# Altium PCB Send_Medicine_Motor.PcbDoc (part 4 of 5)
Units mm, origin at the board's own origin, x right, y up, seen from the top; angles counter-clockwise.
Board outline 150.04 x 100.2 mm, 2 copper layers (Top Layer, Bottom Layer); 273 components, 158 nets, 892 pads, 508 vias.
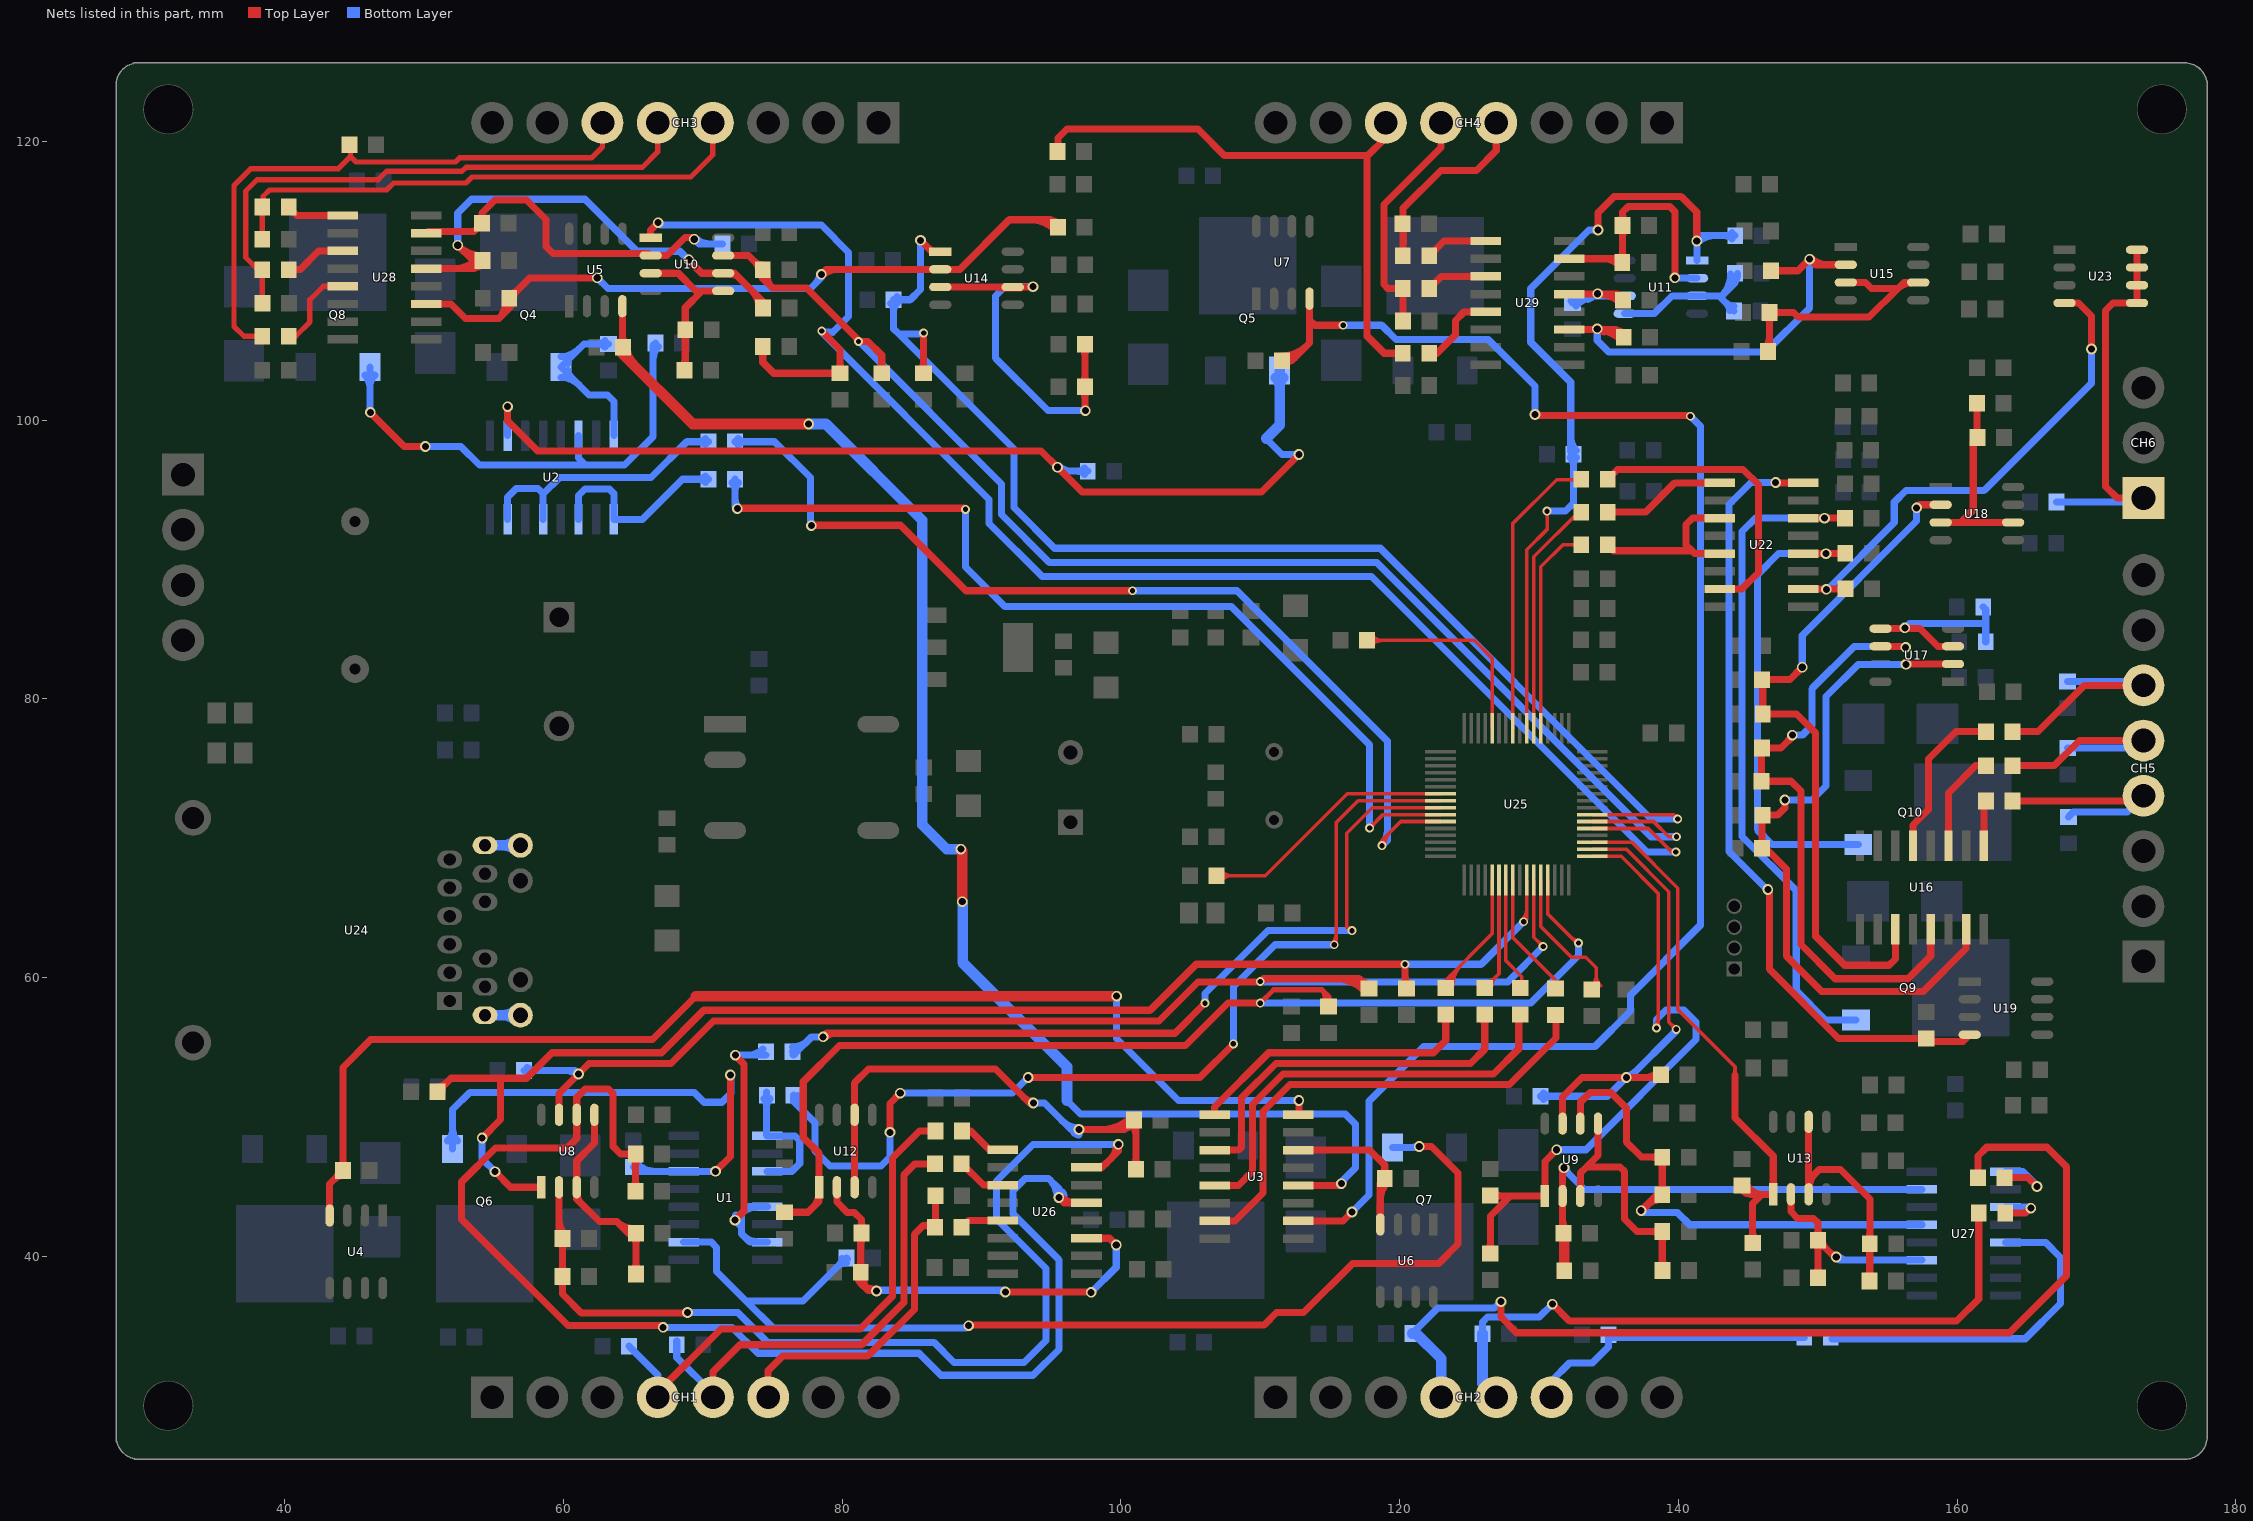
[diagram p4: the nets of this part, all layers, seen from the top]

## Via types
v1: diameter 0.762, hole 0.508, Top Layer to Bottom Layer, 415 vias
v2: diameter 1.27, hole 0.762, Top Layer to Bottom Layer, 47 vias
v3: diameter 0.635, hole 0.381, Top Layer to Bottom Layer, 43 vias
v4: diameter 3.4, hole 3.4, Top Layer to Bottom Layer, 2 vias
v5: diameter 0.6, hole 0.3, Top Layer to Bottom Layer, 1 vias

## Nets (pads, with @x,y where several pads share a name; then routed paths per layer and width w, separated by ;. In a path a pad name is that pad's centre, name@x,y a point inside that pad or via, vN(x,y) a via of type N, cw(c..) or ccw(c..) an arc to the next point about the centre after c; other vN are vias at no path point) (continued)
NetQ4_1: Q4.1 R8.1 U2.16 | length 16.3
  Bottom Layer w0.508: Q4.1@59.831,103.073 cw(c59.831,101.272) 61.105,102.545 ; Q4.1@59.831,104.565 ccw(c59.831,106.366) 61.105,105.093 ; Q4.1@60.327,103.569 ccw(c60.921,103.569) Q4.1@60.501,103.149 ; Q4.1@60.327,104.069 cw(c60.921,104.069) Q4.1@60.501,104.489 ; R8.1@62.993,105.248 ccw(c62.453,104.708) 62.453,105.471 ccw(c62.453,106.234) R8.1@62.993,105.694 ; R8.1@63.246,105.471 61.483,105.471 Q4.1@59.831,103.819 61.834,101.816 63.157,101.816 63.627,101.346 U2.16@63.627,98.885
NetQ5_1: Q5.1 R13.1 U2.10 | length 77.1
  Top Layer w0.508: v1(56.007,100.965) 56.007,99.949 58.166,97.79 94.285,97.79 v1(95.453,96.622) 97.231,94.844 110.084,94.844 v1(112.776,97.536)
  Bottom Layer w0.508: U2.10@56.007,98.885 v1(56.007,100.965) ; v1(95.453,96.622) 95.733,96.342 R13.1@97.627,96.342 ; v1@95.543,96.711 ccw(c96.434,97.603) 96.434,96.342 ; R13.1@97.404,96.119 ccw(c96.865,95.579) 96.865,96.342 ccw(c96.865,97.105) R13.1@97.404,96.566 ; 110.424,98.679 111.567,97.536 v1(112.776,97.536)
  Bottom Layer w0.762: 110.424,98.679 111.393,99.648 Q5.1@111.393,103.565 ; Q5.1@111.132,103.054 cw(c110.502,102.424) 111.393,102.424 cw(c112.284,102.424) Q5.1@111.654,103.054
NetQ6_1: Q6.1 R14.1 U1.14 | length 41.9
  Top Layer w0.508: v1(70.917,46.101) 71.984,47.168 v1(71.984,53.01)
  Bottom Layer w0.508: Q6.1@51.705,48.293 ccw(c50.859,49.139) 52.056,49.139 ccw(c53.253,49.139) Q6.1@52.407,48.293 ; Q6.1@52.056,47.692 52.056,50.532 53.289,51.765 69.393,51.765 70.104,51.054 71.374,51.054 72.009,51.689 72.009,52.984 v1(71.984,53.01) ; R14.1@65.024,46.421 65.344,46.101 U1.14@68.628,46.101 v1(70.917,46.101) ; R14.1@65.277,46.644 ccw(c66.589,47.956) 66.589,46.101
NetQ7_1: Q7.1 R15.1 U1.10 | length 82.5
  Top Layer w0.508: v1(89.078,35.027) 89.129,35.077 110.287,35.077 111.176,35.966 113.106,35.966 116.637,39.497 122.809,39.497 124.206,40.894 124.206,45.974 122.301,47.879 v1(121.412,47.879)
  Bottom Layer w0.508: U1.10@68.628,41.021 70.612,41.021 70.993,40.64 70.993,38.913 73.101,36.805 ; 79.627,39.241 cw(c80.33,38.537) R15.1@80.33,39.532 ; R15.1@79.858,39.472 ccw(c79.483,39.848) R15.1@80.014,39.848 ; R15.1@80.33,39.878 80.391,39.817 80.203,39.817 77.191,36.805 73.101,36.805 ; v1(89.078,35.027) 88.9,34.849 75.057,34.849 73.101,36.805 ; Q7.1@119.493,47.819 121.352,47.819 v1(121.412,47.879) ; 120.961,47.819 ccw(c120.961,48.33) v1@121.322,47.969
NetQ8_1: Q8.1 R16.1 U2.14 | length 38.4
  Top Layer w0.508: v1(46.152,100.559) 46.152,100.533 48.58,98.105 v1(50.099,98.105)
  Bottom Layer w0.508: Q8.1@45.764,103.218 cw(c44.918,102.372) 46.115,102.372 cw(c47.312,102.372) Q8.1@46.466,103.218 ; 46.115,100.954 ccw(c46.547,100.954) v1@46.242,100.648 ; Q8.1@46.115,103.819 46.115,100.595 v1(46.152,100.559) ; v1(50.099,98.105) 52.644,98.105 53.975,96.774 61.595,96.774 ; U2.14@61.087,98.885 61.087,97.282 61.595,96.774 ; 66.446,104.339 cw(c67.782,104.339) R16.1@66.837,105.284 ; R16.1@66.614,105.537 66.446,105.369 66.446,98.831 64.389,96.774 61.595,96.774
NetQ9_1: Q9.1 R88.1 U22.14 | length 49
  Top Layer w0.508: U22.14@148.974,92.964 v1(150.495,92.964) R88.1@151.958,92.964
  Bottom Layer w0.508: v1(150.495,92.964) 145.542,92.964 144.577,91.999 144.577,70.129 148.463,66.243 148.463,59.055 150.56,56.958 Q9.1@152.765,56.958
NetQ10_1: Q10.1 R112.1 U22.12 | length 34.6
  Top Layer w0.508: U22.12@148.974,90.424 v1(150.597,90.424) 151.958,90.424 R112.1@151.983,90.449
  Bottom Layer w0.508: v1(150.597,90.424) 147.193,90.424 145.669,88.9 145.669,70.612 146.724,69.557 Q10.1@152.917,69.557
NetR1_1: R1.1 U3.16 U4.4 | length 90.1
  Top Layer w0.508: U4.4@43.231,42.926 43.231,45.197 R1.1@44.186,46.152 44.186,53.558 46.177,55.55 66.396,55.55 69.52,58.674 ; 43.595,45.561 cw(c44.186,44.97) R1.1@44.186,45.806 ; R1.1@43.668,45.634 ccw(c43.179,46.122) R1.1@43.87,46.122 ; R1.1@43.962,46.405 ccw(c43.423,46.945) 44.186,46.945 ccw(c44.949,46.945) R1.1@44.409,46.405 ; U3.16@112.728,50.165 112.776,50.213 v1(112.776,51.181)
  Top Layer w0.762: 69.52,58.674 v1(99.695,58.674)
  Bottom Layer w0.508: v1(99.695,58.674) 99.695,55.626 104.14,51.181 v1(112.776,51.181)
NetR2_1: R2.1 U3.12 U5.4 | length 109.2
  Top Layer w0.508: R2.1@64.049,105.486 ccw(c63.595,105.939) 64.237,105.939 ; R2.1@64.237,105.268 U5.4@64.237,108.179 ; 64.237,106.111 ccw(c65.121,106.111) R2.1@64.496,105.486 ; U3.12@112.728,45.085 115.517,45.085 v1@115.734,45.302 ; v1@115.824,45.085 v1(115.824,45.212)
  Top Layer w0.762: R2.1@64.237,105.232 R2.1@64.237,105.268 ; R2.1@64.272,105.232 64.272,104.739 69.291,99.72 v1(77.597,99.72) ; R2.1@64.461,105.202 ccw(c66.035,105.202) 64.922,104.09 ; v1(88.519,69.215) 88.621,69.113 v1(88.621,65.456)
  Bottom Layer w0.508: 96.139,51.181 97.104,50.216 116.103,50.216 116.84,49.479 116.84,46.355 115.57,45.085 115.824,45.085 v1(115.824,45.212) ; v1@115.951,45.212 cw(c116.564,45.212) 116.131,45.646
  Bottom Layer w0.762: v1(77.597,99.72) 78.842,99.72 85.75,92.812 85.75,70.968 87.503,69.215 v1(88.519,69.215) ; v1(88.621,65.456) 88.646,65.43 88.646,61.087 96.139,53.594 96.139,51.181
NetR3_2: R3.2 U3.1 | length 22.2
  Top Layer w0.508: U3.1@106.728,50.165 106.728,50.721 110.617,54.61 122.428,54.61 123.317,55.499 R3.2@123.317,57.343 ; R3.2@123.094,57.12 cw(c122.554,56.58) 123.317,56.58 cw(c124.08,56.58) R3.2@123.54,57.12
NetR4_2: R4.2 U3.5 | length 31.2
  Top Layer w0.508: U3.5@106.728,45.085 108.433,45.085 109.449,46.101 109.449,50.902 111.633,53.086 126.746,53.086 128.555,54.895 R4.2@128.555,57.12 ; R4.2@128.778,57.12 R4.2@128.778,57.343
NetR9_2: R9.2 U2.5 U2.7 | length 21
  Bottom Layer w0.508: U2.7@56.007,92.885 56.007,94.488 56.617,95.098 58.191,95.098 58.547,94.742 58.547,94.691 ; U2.5@58.547,92.885 58.547,94.691 ; R9.2@70.201,98.227 ccw(c69.661,97.688) 69.661,98.45 ccw(c69.661,99.213) R9.2@70.201,98.674 ; R9.2@70.424,98.45 68.859,98.45 66.294,95.885 59.741,95.885 58.547,94.691
NetR10_2: R10.2 U1.1 U1.3 | length 11.1
  Bottom Layer w0.508: R10.2@74.392,51.309 cw(c73.975,50.892) 74.564,50.892 ; 74.564,50.646 cw(c75.501,50.646) R10.2@74.838,51.309 ; R10.2@74.564,51.791 74.564,48.705 U1.1@74.628,48.641 76.632,48.641 76.962,48.311 76.962,46.66 76.403,46.101 U1.3@74.628,46.101
NetR11_2: R11.2 U1.5 U1.7 | length 25.7
  Top Layer w0.508: v1(72.314,42.596) 72.949,43.231 72.949,53.797 72.314,54.432 v1(72.339,54.432)
  Bottom Layer w0.508: v1@72.3,42.47 cw(c72.237,41.913) 72.796,41.913 ; v1(72.314,42.596) 72.796,42.113 ; v1(72.339,54.432) R11.2@74.539,54.432 ; 72.357,42.974 cw(c72.301,42.482) 72.796,42.482 ; 72.812,43.094 cw(c73.828,42.079) U1.5@73.828,43.515 ; 72.986,41.416 ccw(c73.828,42.258) U1.7@73.828,41.067 ; 73.235,54.432 ccw(c73.235,55.96) R11.2@74.315,54.88 ; U1.7@74.628,41.021 73.381,41.021 72.796,41.605 72.796,42.113 ; U1.5@74.628,43.561 73.279,43.561 72.796,43.078 72.796,42.113
NetR12_2: R12.2 U2.1 U2.3 | length 15.6
  Bottom Layer w0.508: U2.3@61.087,92.885 61.087,94.59 61.544,95.047 63.297,95.047 63.627,94.717 U2.1@63.627,92.885 65.682,92.885 68.555,95.758 R12.2@70.399,95.758 ; R12.2@70.201,95.535 ccw(c69.661,94.995) 69.661,95.758 ccw(c69.661,96.521) R12.2@70.201,95.981
NetR17_2: R17.2 U16.1 | length 3.3
  Top Layer w0.508: U16.1@161.925,69.472 161.925,72.527 R17.2@162.067,72.669
NetR21_1: R21.1 U3.14 U6.4 | length 13.7
  Top Layer w0.508: U3.14@112.728,47.625 117.856,47.625 118.938,46.543 R21.1@118.938,45.593 118.618,45.273 U6.4@118.618,42.291 ; 118.618,44.028 cw(c120.473,44.028) R21.1@119.161,45.34 ; R21.1@118.715,45.846 ccw(c118.175,46.386) 118.938,46.386 ccw(c119.701,46.386) R21.1@119.161,45.846
NetR22_2: R22.2 U16.3 | length 7.3
  Top Layer w0.508: U16.3@159.385,69.472 159.385,73.254 161.341,75.209 R22.2@162.093,75.209
NetR23_2: R23.2 R24.1 U17.3 U17.5 | length 14.2
  Top Layer w0.508: U17.5@154.515,85.039 157.353,85.039 158.623,83.769 U17.3@159.715,83.769
  Bottom Layer w0.508: v1(156.261,85.09) 156.591,85.42 162.062,85.42 ; R24.1@161.884,86.589 162.062,86.411 162.062,85.42 ; R23.2@162.062,84.099 162.062,85.42
NetR26_1: R26.1 U3.10 U7.4 | length 120.6
  Top Layer w0.508: R26.1@111.567,104.105 ccw(c111.567,105.406) 112.487,104.486 ; R26.1@111.567,104.267 112.268,104.267 ; R26.1@111.567,104.613 ccw(c111.567,107.141) 113.354,105.353 ; R26.1@111.804,104.058 cw(c112.268,103.648) 112.268,104.267 ; R26.1@111.804,104.476 ccw(c112.268,104.886) 112.268,104.267 ; U3.10@112.728,42.545 115.951,42.545 v1(116.586,43.18) ; U7.4@113.538,108.712 113.538,107.188 ; v3(115.951,106.807) 113.919,106.807 113.538,107.188 ; v1(129.718,100.406) 129.794,100.33 140.818,100.33 v3(140.868,100.279) ; v1@129.808,100.496 ccw(c130.208,100.897) 130.208,100.33 ; 112.268,104.267 113.538,105.537 113.538,107.188
  Bottom Layer w0.508: v3(115.951,106.807) 118.72,106.807 119.736,105.791 126.365,105.791 129.718,102.438 v1(129.718,100.406) ; v1(116.586,43.18) 117.805,44.399 117.805,51.13 121.717,55.042 134.01,55.042 136.563,57.594 136.563,58.737 141.58,63.754 141.58,99.568 v3(140.868,100.279)
NetR27_2: R27.2 U3.3 | length 28.1
  Top Layer w0.508: U3.3@106.728,47.625 108.458,47.625 108.661,47.828 108.661,51.384 111.125,53.848 125.095,53.848 126.111,54.864 R27.2@126.111,57.343 ; R27.2@125.888,57.12 cw(c125.348,56.58) 126.111,56.58 cw(c126.874,56.58) R27.2@126.334,57.12
NetR28_2: R28.2 U3.7 | length 35
  Top Layer w0.508: U3.7@106.728,42.545 108.204,42.545 110.211,44.552 110.211,50.394 112.141,52.324 127.889,52.324 131.222,55.657 R28.2@131.222,57.12 ; R28.2@131.445,57.12 R28.2@131.445,57.343
NetR29_2: R29.2 U26.1 | length 3.5
  Top Layer w0.508: R29.2@88.605,48.997 89.23,48.997 90.576,47.65 U26.1@91.539,47.65
NetR30_2: R30.2 U27.1 | length 5.3
  Top Layer w0.508: R30.2@163.408,45.644 165.1,45.644 v1(165.735,45.009)
  Bottom Layer w0.508: U27.1@163.477,46.076 164.744,46.076 165.735,45.085 v1(165.735,45.009)
NetR31_2: R31.2 U28.1 | length 4
  Top Layer w0.508: R31.2@40.371,115.189 40.879,114.681 U28.1@44.168,114.681
NetR32_2: R32.2 U29.1 | length 4.5
  Top Layer w0.508: R32.2@122.133,111.785 123.2,112.852 U29.1@126.184,112.852
NetR37_2: R37.2 R45.1 U8.3 U8.5 | length 20.1
  Top Layer w0.508: U8.3@61.006,44.458 ccw(c61.934,44.458) 61.278,43.802 ; U8.5@62.23,50.158 62.23,48.133 60.96,46.863 U8.3@60.96,44.958 60.96,44.12 62.586,42.494 63.83,42.494 ; 64.599,41.725 ccw(c65.163,42.29) R45.1@65.234,41.495 ; R37.2@64.994,38.988 ccw(c64.454,39.528) 65.217,39.528 ccw(c65.98,39.528) R37.2@65.44,38.988 ; R45.1@64.994,41.403 cw(c64.454,40.863) 65.217,40.863 cw(c65.98,40.863) R45.1@65.44,41.403 ; R45.1@65.189,42.001 cw(c65.038,43.701) 63.83,42.494 ; R37.2@65.217,38.735 R45.1@65.217,41.656 64.668,41.656 63.83,42.494
NetR38_2: R38.2 U26.3 | length 3.6
  Top Layer w0.508: R38.2@88.58,46.634 88.621,46.634 90.145,45.11 U26.3@91.539,45.11
NetR39_2: R39.2 R46.1 U9.3 U9.5 | length 21.5
  Top Layer w0.508: U9.3@132.969,44.323 132.969,45.974 133.413,46.419 ; U9.5@134.239,49.523 134.239,47.244 133.413,46.419 ; R46.1@138.628,41.53 cw(c138.089,40.99) 138.852,40.99 cw(c139.614,40.99) R46.1@139.075,41.53 ; R46.1@138.628,41.56 ccw(c138.089,41.02) 138.089,41.783 ccw(c138.089,42.546) R46.1@138.628,42.006 ; R39.2@138.654,39.242 ccw(c138.175,39.721) 138.852,39.721 ; 138.852,39.843 ccw(c139.701,39.843) R39.2@139.1,39.242 ; R39.2@138.877,38.989 138.852,39.014 R46.1@138.852,41.783 137.033,41.783 136.144,42.672 136.144,46.101 135.826,46.419 133.413,46.419
NetR40_2: R40.2 U27.3 | length 4.3
  Top Layer w0.508: R40.2@163.459,43.104 164.897,43.104 165.278,43.485 v1(165.303,43.459)
  Bottom Layer w0.508: U27.3@163.477,43.536 165.227,43.536 v1(165.303,43.459) ; 164.813,43.536 cw(c164.813,42.969) v1@165.213,43.37
NetR41_2: R41.2 R49.1 U10.3 U10.5 | length 15.5
  Top Layer w0.508: U10.3@66.269,110.541 68.25,110.541 69.52,109.271 69.952,109.271 ; R49.1@68.473,103.835 ccw(c67.811,104.497) 68.748,104.497 ; R41.2@68.524,106.223 cw(c67.985,105.684) 68.748,105.684 cw(c69.51,105.684) R41.2@68.971,106.223 ; R41.2@68.524,106.73 ccw(c67.985,107.27) 68.748,107.27 ccw(c69.51,107.27) R41.2@68.971,106.73 ; R49.1@68.697,103.581 68.748,103.632 R41.2@68.748,106.477 68.748,108.067 69.952,109.271 ; 68.748,104.251 ccw(c69.337,104.251) R49.1@68.92,103.835 ; U10.5@71.469,109.271 69.952,109.271
NetR42_2: R42.2 U28.3 | length 4.4
  Top Layer w0.508: R42.2@40.295,110.795 41.097,110.795 42.443,112.141 U28.3@44.168,112.141
NetR43_2: R43.2 R50.1 U11.3 U11.5 | length 14.2
  Bottom Layer w0.508: U11.5@136.151,107.645 138.278,107.645 139.548,108.915 U11.3@141.351,108.915 142.916,108.915 ; 143.417,108.414 ccw(c144.008,109.004) R50.1@144.008,108.169 ; R50.1@143.49,108.341 cw(c143.001,107.853) R50.1@143.692,107.853 ; R43.2@143.743,110.5 cw(c141.609,110.425) 143.119,108.915 ; 143.945,109.741 ccw(c143.205,110.481) R43.2@144.25,110.518 ; R50.1@144.008,107.823 142.916,108.915 ; 144.059,109.855 143.119,108.915 ; 142.916,108.915 143.119,108.915
NetR44_2: R44.2 U29.3 | length 4.4
  Top Layer w0.508: R44.2@122.133,109.449 122.997,110.312 U29.3@126.184,110.312
NetR53_2: R53.2 U26.5 | length 3.2
  Top Layer w0.508: R53.2@88.58,42.088 89.063,42.57 U26.5@91.539,42.57
NetR54_2: R54.2 U27.5 | length 25.9
  Bottom Layer w0.508: R54.2@151.039,34.087 164.897,34.087 167.437,36.627 167.437,39.929 166.37,40.996 U27.5@163.477,40.996 ; R54.2@151.16,34.382 ccw(c151.873,35.094) 151.873,34.087
NetR55_2: R55.2 U28.5 | length 6.3
  Top Layer w0.381: R55.2@40.295,106.02 40.792,106.02 41.808,107.036 41.808,108.636 42.774,109.601 U28.5@44.168,109.601
NetR56_2: R56.2 U29.5 | length 5.9
  Top Layer w0.508: R56.2@122.133,104.8 122.682,104.8 124.003,106.121 124.003,107.137 124.638,107.772 U29.5@126.184,107.772
NetR63_2: R63.2 R69.1 U12.3 U12.6 | length 43.2
  Top Layer w0.508: U12.3@80.899,44.958 U12.6@80.899,50.158 80.899,52.451 81.89,53.442 91.008,53.442 93.447,51.003 v1(93.726,51.003) ; 93.032,51.418 ccw(c93.726,52.111) v1@93.726,51.13 ; v1(97.003,49.098) 100.269,49.098 R69.1@100.955,49.784 101.082,49.657 R63.2@101.082,46.253 ; 98.609,49.098 ccw(c98.609,52.1) R69.1@100.731,49.977 ; 99.835,49.098 ccw(c99.835,50.874) R69.1@101.091,49.618 ; 100.364,49.193 cw(c100.955,48.603) R69.1@100.955,49.438 ; R69.1@100.437,49.266 ccw(c99.948,49.754) R69.1@100.639,49.754 ; R69.1@100.731,49.531 cw(c99.885,48.685) 101.082,48.685 ; R63.2@100.858,46.507 ccw(c100.319,47.046) 101.082,47.046 ccw(c101.845,47.046) R63.2@101.305,46.507
  Bottom Layer w0.508: v1(93.726,51.003) 94.513,51.003 96.418,49.098 v1(97.003,49.098) ; 95.789,49.728 ccw(c97.003,50.942) v1@97.003,49.225 ; 96.656,48.861 ccw(c97.003,49.208) 97.003,48.717
NetR64_2: R64.2 R70.1 U13.3 U13.6 | length 21
  Top Layer w0.508: U13.3@149.352,44.45 149.352,45.466 ; U13.6@149.352,49.65 149.352,45.466 ; U13.3@149.398,44.95 cw(c150.755,44.95) 149.795,45.909 ; R70.1@153.487,38.48 ccw(c152.886,39.081) 153.736,39.081 ; R64.2@153.513,40.641 cw(c152.973,40.101) 153.736,40.101 cw(c154.499,40.101) R64.2@153.959,40.641 ; R64.2@153.513,41.147 ccw(c152.948,41.712) 153.746,41.712 ; R70.1@153.711,38.227 153.736,38.252 R64.2@153.736,40.894 ; 153.736,38.959 ccw(c154.412,38.959) R70.1@153.934,38.48 ; R64.2@153.736,41.275 153.746,41.285 153.746,44.12 151.638,46.228 150.114,46.228 149.352,45.466 ; 153.746,41.662 ccw(c154.474,41.662) R64.2@153.959,41.147
NetR67_2: R67.2 R71.1 U14.3 U14.6 | length 32.5
  Top Layer w0.508: U14.3@87.046,109.55 U14.6@92.246,109.55 U14.6@92.913,109.55 ; 91.306,109.474 92.837,109.474 U14.6@92.913,109.55 ; 91.451,109.474 ccw(c91.451,109.845) U14.6@91.713,109.583 ; v1(93.701,109.576) 93.675,109.55 U14.6@92.913,109.55 ; R67.2@97.196,102.134 cw(c96.656,101.595) 97.419,101.595 cw(c98.182,101.595) R67.2@97.643,102.134 ; R67.2@97.196,102.641 ccw(c96.656,103.18) 97.419,103.18 ccw(c98.182,103.18) R67.2@97.643,102.641 ; R71.1@97.196,105.182 cw(c96.656,104.643) 97.419,104.643 cw(c98.182,104.643) R71.1@97.643,105.182 ; 97.419,101.09 ccw(c97.864,101.09) v1@97.55,100.775 ; R67.2@97.419,102.387 97.419,100.726 v1(97.46,100.686) ; R67.2@97.419,102.819 R71.1@97.419,105.486 ; R67.2@97.46,102.387 R67.2@97.46,102.54
  Bottom Layer w0.508: v1(93.701,109.576) 93.675,109.601 91.694,109.601 91.008,108.915 91.008,104.445 94.767,100.686 v1(97.46,100.686)
NetR68_2: R68.2 R72.1 U15.3 U15.6 | length 22.9
  Top Layer w0.508: R68.2@146.218,105.181 ccw(c145.433,105.966) 146.543,105.966 ; R72.1@146.319,107.468 cw(c145.78,106.929) 146.543,106.929 cw(c147.306,106.929) R72.1@146.766,107.468 ; R68.2@146.441,104.927 146.543,105.029 R72.1@146.543,107.721 148.26,107.721 148.59,107.391 153.695,107.391 155.753,109.449 ; R72.1@146.766,107.498 cw(c147.306,106.959) 147.306,107.721 cw(c147.306,108.484) R72.1@146.766,107.945 ; U15.3@152.019,109.88 153.441,109.88 153.873,109.449 155.753,109.449 ; U15.6@156.718,109.834 ccw(c156.685,108.516) 155.753,109.449 ; U15.6@157.219,109.88 156.185,109.88 155.753,109.449
NetR77_2: R77.2 U16.5 | length 11.6
  Top Layer w0.508: U16.5@156.845,69.472 156.845,70.942 157.963,72.06 157.963,75.692 159.918,77.648 R77.2@162.093,77.648
NetR81_2: R81.2 R82.1 U18.3 U18.6 | length 14.3
  Top Layer w0.508: U18.3@158.826,92.659 160.249,92.659 ; R82.1@161.432,101.219 161.432,98.73 161.163,98.461 161.163,93.574 160.249,92.659 ; U18.6@164.026,92.659 160.249,92.659
NetR86_1: R86.1 U19.4 U22.16 | length 57.3
  Top Layer w0.508: v1(146.431,66.319) 146.533,66.218 146.533,60.604 151.496,55.641 R86.1@157.785,55.641 158.003,55.423 160.426,55.423 U19.4@160.909,55.905 ; v1(146.99,95.529) 147.015,95.504 U22.16@148.974,95.504
  Bottom Layer w0.508: v1(146.431,66.319) 146.355,66.319 143.637,69.037 143.637,93.955 145.212,95.529 v1(146.99,95.529)
NetR87_2: R87.2 U22.1 | length 8.9
  Top Layer w0.508: R87.2@134.935,93.396 137.643,93.396 139.751,95.504 U22.1@142.974,95.504
NetR89_2: R89.2 U22.3 U22.5 | length 12.9
  Top Layer w0.508: R89.2@134.935,91.059 135.367,90.627 140.97,90.627 ; U22.5@142.974,90.424 141.173,90.424 140.97,90.627 ; U22.3@142.974,92.964 141.021,92.964 140.564,92.507 140.564,91.034 140.97,90.627
NetR91_2: R91.2 U25.60 | length 16.1
  Top Layer w0.254: R91.2@117.729,84.201 125.349,84.201 126.636,82.914 U25.60@126.636,77.9 ; R91.2@118.043,83.887 cw(c118.802,83.128) 118.802,84.201 cw(c118.802,85.274) R91.2@118.043,84.515
NetR93_2: R93.2 U25.7 | length 20.1
  Top Layer w0.254: R93.2@106.934,67.31 110.363,67.31 116.253,73.2 U25.7@122.936,73.2 ; R93.2@107.248,66.996 cw(c108.007,66.237) 108.007,67.31 cw(c108.007,68.383) R93.2@107.248,67.624
NetR94_2: R94.2 U25.28 | length 11.8
  Top Layer w0.254: U25.28@130.136,67 130.136,63.666 132.334,61.468 133.35,61.468 134.112,60.706 R94.2@134.112,59.116 ; R94.2@133.799,59.429 ccw(c133.043,60.185) 134.112,60.185 ccw(c135.181,60.185) 134.425,59.429
NetR113_1: R113.1 U22.10 U23.4 | length 36.2
  Top Layer w0.508: U22.10@148.974,87.884 151.983,87.884 R113.1@152.009,87.909 ; U23.4@167.716,108.407 168.707,108.407 169.647,107.467 v1(169.647,105.105)
  Bottom Layer w0.508: v1(150.622,87.859) 150.698,87.859 155.499,92.659 155.499,94.107 156.337,94.945 161.95,94.945 169.647,102.641 v1(169.647,105.105)
NetR114_2: R114.2 U22.7 | length 21.1
  Top Layer w0.508: R114.2@134.935,95.758 135.646,96.469 144.653,96.469 145.745,95.377 145.745,89.078 144.551,87.884 U22.7@142.974,87.884
NetU24_7: U24.7 U24.13 | length 4.5
  Bottom Layer w0.762: U24.7@54.381,57.302 U24.13@56.921,57.302 ; U24.13@56.562,56.943 ccw(c55.695,56.076) 55.695,57.302 ccw(c55.695,58.529) U24.13@56.562,57.662
NetU24_12: U24.12 U24.16 | length 4.5
  Bottom Layer w0.762: U24.12@54.381,69.494 U24.16@56.921,69.494 ; U24.16@56.562,69.135 ccw(c55.695,68.268) 55.695,69.494 ccw(c55.695,70.721) U24.16@56.562,69.854
PL1: R3.1 U25.21 | length 14
  Top Layer w0.254: R3.1@123.205,59.672 ccw(c123.167,59.817) 123.317,59.817 ; R3.1@123.282,59.243 cw(c124.583,59.243) 123.663,60.163 ; R3.1@123.317,59.243 123.317,59.817 ; R3.1@123.429,59.672 cw(c123.467,59.817) 123.317,59.817 ; R3.1@123.536,59.243 cw(c125.45,59.243) 124.097,60.597 ; R3.1@123.79,59.243 cw(c126.318,59.243) 124.53,61.03 ; U25.21@126.636,67 126.636,63.136 123.317,59.817
PL2: R27.1 U25.22 | length 9.9
  Top Layer w0.254: R27.1@126.111,59.243 127.136,60.268 U25.22@127.136,67 ; R27.1@126.141,59.686 ccw(c126.141,60.683) 126.846,59.978 ; R27.1@126.584,59.243 cw(c127.726,59.243) 126.918,60.05
PL3: R4.1 U25.23 | length 8.2
  Top Layer w0.254: U25.23@127.636,67 127.636,61.213 128.778,60.071 R4.1@128.778,59.243
PL4: R28.1 U25.24 | length 9
  Top Layer w0.254: U25.24@128.136,67 128.136,62.872 131.226,59.782 R28.1@131.226,59.243
PL5: R87.1 U25.54 | length 17
  Top Layer w0.254: U25.54@129.636,77.9 129.636,90.19 132.842,93.396 R87.1@133.035,93.396
PM1: R10.1 U25.8 | length 72.6
  Top Layer w0.254: v3@115.181,62.492 ccw(c114.549,63.124) 115.443,63.124 ; v3(115.316,62.357) 115.443,62.484 115.443,71.12 117.023,72.7 U25.8@122.936,72.7
  Top Layer w0.508: v1(83.439,48.895) 83.439,50.978 v1(84.176,51.714) ; v1(93.345,52.832) 105.664,52.832 v3(108.077,55.245)
  Bottom Layer w0.508: R10.1@76.515,51.562 76.515,51.12 78.054,49.581 78.054,47.549 79.121,46.482 82.804,46.482 83.439,47.117 v1(83.439,48.895) ; R10.1@76.831,51.532 ccw(c78.589,51.532) 77.346,50.289 ; v1(84.176,51.714) 92.227,51.714 v1(93.345,52.832) ; v3(108.077,55.245) 108.077,59.36 111.074,62.357 v3(115.316,62.357)
PM2: R11.1 U25.9 | length 61.8
  Top Layer w0.254: v3@116.524,63.553 cw(c116.424,63.846) 116.205,63.627 ; v3(116.586,63.373) 116.459,63.373 116.205,63.627 ; U25.9@122.936,72.2 118.047,72.2 116.205,70.358 116.205,63.627
  Top Layer w0.508: v1(78.638,55.753) 78.892,56.007 103.886,56.007 v3(106.045,58.166) ; v1@78.728,55.663 cw(c79.558,54.833) 79.558,56.007
  Bottom Layer w0.508: R11.1@76.439,54.686 R11.1@76.759,54.686 ; R11.1@76.439,55.032 ccw(c76.439,56.64) 77.576,55.503 ; R11.1@76.464,54.458 76.53,54.458 R11.1@76.759,54.686 ; v1(78.638,55.753) 77.826,55.753 R11.1@76.759,54.686 ; v3(106.045,58.166) 106.045,58.852 110.566,63.373 v3(116.586,63.373)
PM3: R12.1 U25.10 | length 71.4
  Top Layer w0.254: v3(117.856,70.739) 118.817,71.7 U25.10@122.936,71.7 ; v3@117.856,70.929 ccw(c117.856,71.389) 118.181,71.064 ccw(c118.506,70.739) v3@118.046,70.739
  Top Layer w0.508: v1(72.492,93.65) 72.517,93.675 88.773,93.675 v3(88.849,93.599) ; 88.512,93.675 cw(c88.512,93.262) v3@88.804,93.554
  Bottom Layer w0.508: R12.1@72.101,95.505 cw(c71.561,94.965) 72.324,94.965 cw(c73.087,94.965) R12.1@72.547,95.505 ; 72.324,94.361 ccw(c73.203,94.361) v1@72.581,93.74 ; R12.1@72.324,95.758 72.324,93.817 v1(72.492,93.65) ; v3(88.849,93.599) 88.849,89.459 91.694,86.614 107.95,86.614 117.856,76.708 v3(117.856,70.739)
PM4: R9.1 U25.11 | length 75.5
  Top Layer w0.254: v3@118.631,69.621 ccw(c118.459,69.85) 118.745,69.85 ; v3@118.681,69.469 cw(c119.448,69.469) 118.906,70.011 ; v3(118.745,69.469) 118.745,69.85 ; v3@118.859,69.621 cw(c119.031,69.85) 118.745,69.85 ; v3@118.935,69.469 cw(c120.315,69.469) 119.34,70.445 ; U25.11@122.936,71.2 120.095,71.2 118.745,69.85
  Top Layer w0.508: v1(77.8,92.431) 77.8,92.456 84.201,92.456 88.9,87.757 v3(100.838,87.757)
  Bottom Layer w0.508: R9.1@72.324,98.45 75.159,98.45 77.724,95.885 77.724,92.507 v1(77.8,92.431) ; R9.1@72.547,98.227 cw(c73.087,97.688) 73.087,98.45 cw(c73.087,99.213) R9.1@72.547,98.674 ; 77.724,92.921 ccw(c78.291,92.921) v1@77.89,92.52 ; v3(100.838,87.757) 108.331,87.757 119.126,76.962 119.126,69.85 v3(118.745,69.469) ; v3@118.7,69.514 ccw(c117.672,70.542) 119.126,70.542
PM5: R89.1 U25.53 | length 15.1
  Top Layer w0.254: U25.53@130.136,77.9 130.136,89.471 131.724,91.059 R89.1@133.035,91.059
PRUN: R114.1 U25.57 | length 20.9
  Top Layer w0.254: U25.57@128.136,77.9 128.136,92.601 131.267,95.733 133.01,95.733 R114.1@133.035,95.758
RUN: C87.1 CH6.1 U23.5 U23.6 U23.7 U23.8 | length 28.3
  Top Layer w0.508: U23.8@172.916,112.217 U23.7@172.916,110.947 U23.6@172.916,109.677 U23.5@172.916,108.407 171.196,108.407 170.663,107.874 170.663,95.25 171.501,94.412 CH6.1@173.38,94.412
  Bottom Layer w0.508: C87.1@167.142,94.132 173.101,94.132 CH6.1@173.38,94.412
S11: C56.2 R33.1 U8.2 U26.15 | length 77.9
  Top Layer w0.508: 59.69,42.656 ccw(c61.285,42.656) R33.1@60.157,41.528 ; U8.2@59.69,44.958 59.69,41.519 R33.1@59.934,41.275 C56.2@59.934,38.557 59.934,37.297 61.29,35.941 68.885,35.941 v1(68.91,35.966) ; C56.2@59.71,38.304 cw(c59.171,37.764) 59.934,37.764 cw(c60.697,37.764) C56.2@60.157,38.304 ; C56.2@59.71,38.811 ccw(c59.171,39.35) 59.934,39.35 ccw(c60.697,39.35) C56.2@60.157,38.811 ; R33.1@59.71,41.022 cw(c59.171,40.482) 59.934,40.482 cw(c60.697,40.482) R33.1@60.157,41.022 ; U26.15@97.539,46.38 98.654,46.38 99.822,47.549 v1(99.822,48.031) ; U26.15@98.339,46.426 ccw(c98.339,47.297) 98.955,46.682 ; 99.264,46.991 ccw(c98.223,48.031) v1@99.695,48.031
  Bottom Layer w0.508: v1(68.91,35.966) 72.517,35.966 74.651,33.833 86.589,33.833 88.036,32.385 93.066,32.385 94.64,33.96 94.64,39.116 91.084,42.672 91.084,45.415 93.701,48.031 v1(99.822,48.031)
S12: C64.2 R47.1 U8.6 U26.13 | length 101
  Top Layer w0.508: R47.1@64.943,44.932 ccw(c64.342,45.533) 65.192,45.533 ; C64.2@64.968,47.092 cw(c64.429,46.553) 65.192,46.553 cw(c65.954,46.553) C64.2@65.415,47.092 ; C64.2@64.968,47.122 ccw(c64.429,46.583) 64.429,47.346 ccw(c64.429,48.108) C64.2@64.968,47.569 ; R47.1@65.166,44.679 65.192,44.704 C64.2@65.192,47.346 64.11,47.346 63.576,47.879 63.576,51.689 63.246,52.019 61.57,52.019 60.96,51.41 U8.6@60.96,50.158 60.96,48.463 60.274,47.777 55.143,47.777 52.68,45.314 52.68,42.672 60.325,35.027 67.031,35.027 v1(67.158,34.9) ; 65.192,45.41 ccw(c65.868,45.41) R47.1@65.39,44.932 ; v1(95.555,44.221) 95.936,43.84 U26.13@97.539,43.84 ; v1@95.645,44.311 ccw(c96.781,45.448) U26.13@96.781,43.84
  Bottom Layer w0.508: v1(67.158,34.9) 72.111,34.9 73.965,33.045 85.522,33.045 87.097,31.471 93.701,31.471 95.555,33.325 95.555,39.751 92.278,43.028 92.278,44.729 93.142,45.593 94.818,45.593 95.555,44.856 v1(95.555,44.221) ; 94.889,45.522 cw(c93.588,44.221) v1@95.428,44.221 ; 95.756,44.655 cw(c95.323,44.221) 95.936,44.221
S13: C60.2 R57.1 U12.2 U26.11 | length 40.4
  Top Layer w0.508: U12.2@79.629,44.958 79.629,43.891 80.366,43.155 80.874,43.155 81.392,42.636 C60.2@81.392,41.681 81.341,41.631 R57.1@81.341,38.862 81.341,38.064 ; R57.1@81.118,38.609 cw(c80.578,38.069) 81.341,38.069 cw(c82.104,38.069) R57.1@81.564,38.609 ; R57.1@81.118,39.115 ccw(c80.578,39.655) 81.341,39.655 ccw(c82.104,39.655) R57.1@81.564,39.115 ; R57.1@81.164,38.906 ccw(c81.864,38.614) 81.328,38.078 ; C60.2@81.168,41.428 cw(c80.752,41.011) 81.341,41.011 ; C60.2@81.168,41.935 ccw(c80.629,42.474) 81.392,42.474 ccw(c82.155,42.474) C60.2@81.615,41.935 ; 81.341,40.766 cw(c82.277,40.766) C60.2@81.615,41.428 ; R57.1@81.633,38.711 ccw(c82.622,38.299) 81.864,37.541 ; v1@82.465,37.643 cw(c82.367,39.091) 81.341,38.064 ; v1@82.499,37.541 81.864,37.541 ; v1(91.719,37.44) 97.841,37.44 v1(97.866,37.414) ; U26.11@97.539,41.3 99.187,41.3 v1(99.67,40.818) ; 81.341,38.064 81.864,37.541
  Bottom Layer w0.508: v1(82.474,37.516) 82.525,37.567 91.592,37.567 v1(91.719,37.44) ; v1@82.564,37.426 cw(c82.903,37.087) 82.903,37.567 ; 91.106,37.567 cw(c91.106,36.826) v1@91.63,37.35 ; v1(97.866,37.414) 99.67,39.218 v1(99.67,40.818)
S21: C57.2 R34.1 U9.2 U27.15 | length 36.4
  Top Layer w0.508: R34.1@131.542,41.909 ccw(c131.161,42.29) 131.699,42.29 ; 131.699,42.608 ccw(c132.687,42.608) R34.1@131.988,41.909 ; 131.699,45.803 cw(c132.352,45.803) v1@131.89,46.265 ; R34.1@131.765,41.656 131.699,41.722 U9.2@131.699,44.323 131.699,46.253 v1(131.801,46.355)
  Top Layer w0.762: R34.1@131.631,41.492 cw(c131.186,41.047) 131.816,41.047 ; C57.2@131.816,38.964 R34.1@131.816,41.605
  Bottom Layer w0.508: v1(131.801,46.355) 131.801,46.279 133.274,44.806 U27.15@157.477,44.806 ; v1@131.928,46.355 ccw(c132.418,46.355) 132.071,46.008
S22: C65.2 R48.1 U9.6 U27.13 | length 42.8
  Top Layer w0.508: U9.6@132.969,49.523 132.969,51.054 133.68,51.765 135.153,51.765 136.271,50.648 136.271,48.209 137.363,47.117 R48.1@138.852,47.117 C65.2@138.852,44.425 138.481,44.425 v1(137.338,43.282) ; v1@137.46,43.249 cw(c138.107,43.076) 137.772,43.655 ; v1@137.464,43.268 cw(c137.9,43.223) 137.681,43.602 ; 137.628,43.572 cw(c138.852,42.348) C65.2@138.852,44.079 ; C65.2@138.628,44.678 ccw(c138.089,45.217) 138.852,45.217 ccw(c139.614,45.217) C65.2@139.075,44.678 ; R48.1@138.628,46.864 cw(c138.089,46.324) 138.852,46.324 cw(c139.614,46.324) R48.1@139.075,46.864 ; R48.1@138.628,46.894 ccw(c138.089,46.354) 138.089,47.117 ccw(c138.089,47.88) R48.1@138.628,47.34
  Bottom Layer w0.508: v1(137.338,43.282) 137.465,43.155 139.929,43.155 140.818,42.266 U27.13@157.477,42.266 ; v1@137.428,43.371 ccw(c137.951,43.895) 137.951,43.155
S23: C61.2 R58.1 U13.2 U27.11 | length 21.6
  Top Layer w0.508: U13.2@148.082,44.45 148.082,43.205 148.565,42.723 149.708,42.723 150.023,42.408 R58.1@150.023,38.456 ; R58.1@149.799,38.709 ccw(c149.26,39.248) 150.023,39.248 ccw(c150.785,39.248) R58.1@150.246,38.709 ; C61.2@149.799,40.895 cw(c149.26,40.355) 150.023,40.355 cw(c150.785,40.355) C61.2@150.246,40.895 ; C61.2@149.799,41.401 ccw(c149.26,41.941) 150.023,41.941 ccw(c150.785,41.941) C61.2@150.246,41.401 ; C61.2@150.023,40.802 cw(c150.023,39.967) 150.613,40.557 ; C61.2@150.023,41.148 151.216,39.954 v1(151.333,39.954) ; C61.2@150.339,41.118 ccw(c151.029,41.118) C61.2@150.541,40.63 ; 150.917,40.254 ccw(c151.333,40.67) v1@151.333,40.081
  Bottom Layer w0.508: v1(151.333,39.954) 151.562,39.726 U27.11@157.477,39.726 ; v1@151.423,40.044 ccw(c152.192,40.813) 152.192,39.726
S31: C58.2 R35.1 U10.2 U28.15 | length 27.1
  Top Layer w0.508: U28.15@50.295,113.538 53.584,113.538 R35.1@54.168,114.122 54.168,114.874 55.093,115.799 57.353,115.799 58.75,114.402 58.75,112.471 59.258,111.963 66.116,111.963 U10.2@66.269,111.811 67.437,111.811 68.732,113.106 v1@69.393,113.106
  Bottom Layer w0.508: v1(69.393,112.979) 69.723,112.649 C58.2@71.415,112.649 ; v1@69.483,113.069 ccw(c70.497,114.083) 70.497,112.649
S32: C66.2 R51.1 U10.6 U28.13 | length 45.8
  Top Layer w0.508: U28.13@50.168,110.871 53.609,110.871 ; 52.093,110.871 ccw(c52.093,113.526) R51.1@53.97,111.649 ; v1@52.4,112.573 v1(52.426,112.547) 53.518,111.455 ; v1@52.449,112.524 ccw(c54.193,114.268) R51.1@54.193,111.801 ; 53.317,111.656 ccw(c54.193,112.533) R51.1@54.193,111.293 ; 53.319,110.871 ccw(c53.319,112.3) R51.1@54.329,111.289 ; R51.1@53.675,110.937 ccw(c53.187,111.425) R51.1@53.877,111.425 ; R51.1@53.951,111.253 ccw(c53.518,110.891) 53.518,111.455 ; R51.1@53.951,111.658 cw(c53.518,112.019) 53.518,111.455 ; R51.1@54.191,111.109 ccw(c54.184,110.296) 53.609,110.871 ; v1(69.012,111.506) 69.012,111.455 69.926,110.541 U10.6@71.469,110.541 72.288,110.541 74.336,108.494 C66.2@74.336,108.052 ; v1@69.139,111.506 ccw(c69.568,111.506) 69.265,111.202 ; U10.6@71.969,110.495 cw(c71.969,109.612) 72.593,110.236 ; 73.505,109.324 cw(c72.262,108.082) C66.2@74.02,108.082 ; 53.518,111.455 R51.1@54.193,111.455 53.609,110.871
  Bottom Layer w0.508: v1(52.426,112.547) 52.426,114.859 53.416,115.849 61.544,115.849 65.278,112.116 68.351,112.116 69.012,111.455 v1(69.012,111.506) ; 68.708,111.759 ccw(c69.012,112.062) v1@69.012,111.633
S33: C62.2 R59.1 U14.2 U28.11 | length 59.4
  Top Layer w0.508: U28.11@50.168,108.331 51.943,108.331 52.984,107.29 55.372,107.29 ; R59.1@55.807,108.655 cw(c54.268,108.393) 55.372,107.29 ; R59.1@55.918,108.464 cw(c55.564,108.036) 56.119,108.036 ; 56.068,107.985 ccw(c55.458,108.595) R59.1@56.308,108.74 ; R59.1@56.119,109.083 ccw(c56.119,109.919) 56.709,109.328 ; R59.1@56.32,108.464 ccw(c56.673,108.036) 56.119,108.036 ; R59.1@56.435,108.767 cw(c57.125,108.767) R59.1@56.637,109.256 ; v1(62.433,110.211) 57.592,110.211 R59.1@56.119,108.737 56.119,108.036 ; v1(78.511,110.465) 78.867,110.82 U14.2@87.046,110.82 88.443,110.82 91.999,114.376 94.96,114.376 C62.2@95.494,113.843 ; v1@78.601,110.375 cw(c79.677,109.299) 79.677,110.82 ; 93.516,114.376 cw(c93.516,111.895) C62.2@95.27,113.649 ; 94.742,114.376 cw(c94.742,113.121) C62.2@95.63,114.009 ; 55.372,107.29 56.119,108.036
  Bottom Layer w0.508: v1(62.433,110.211) 63.195,109.449 77.724,109.449 78.511,110.236 v1(78.511,110.465) ; 78.133,109.858 ccw(c77.526,110.465) v1@78.384,110.465
S41: C59.2 R36.1 U11.2 U29.15 | length 22.9
  Top Layer w0.508: U29.15@132.184,111.582 135.702,111.582 R36.1@135.981,111.303 136.007,111.328 C59.2@136.007,113.97 136.007,114.925 136.423,115.341 139.37,115.341 139.751,114.96 v1(139.751,110.211) v1@139.725,110.185 ; 134.616,111.582 cw(c134.616,109.968) R36.1@135.758,111.109 ; R36.1@135.758,111.556 ccw(c135.157,112.157) 136.007,112.157 ; C59.2@135.783,113.716 cw(c135.244,113.177) 136.007,113.177 cw(c136.77,113.177) C59.2@136.23,113.716 ; C59.2@135.783,114.223 ccw(c135.244,114.763) 136.007,114.763 ccw(c136.77,114.763) C59.2@136.23,114.223 ; 136.007,112.034 ccw(c136.683,112.034) R36.1@136.205,111.556
  Bottom Layer w0.508: v1(139.751,110.211) 139.776,110.185 U11.2@141.351,110.185
S42: C67.2 R52.1 U11.6 U29.13 | length 15.3
  Top Layer w0.508: U29.13@132.184,109.042 135.6,109.042 R52.1@136.032,108.61 ; v1@134.299,109.042 cw(c134.299,106.907) R52.1@135.809,108.417 ; R52.1@135.526,109.042 cw(c135.526,108.134) R52.1@136.168,108.776
  Bottom Layer w0.508: C67.2@132.304,108.553 cw(c133.178,107.679) 133.178,108.915 ; C67.2@132.41,108.417 132.908,108.915 U11.6@136.151,108.915 ; C67.2@132.664,108.194 cw(c134.405,106.453) v1@134.405,108.915 ; 133.51,108.675 ccw(c133.256,109.62) v1@134.104,109.131 ; 133.539,108.915 ccw(c133.539,109.742) v1@134.124,109.157 ; v1@134.303,109.157 ccw(c134.888,109.742) 134.888,108.915
  other v1: 134.214,109.068
S43: C63.2 R60.1 U15.2 U29.11 | length 38.1
  Top Layer w0.508: U29.11@132.184,106.502 135.524,106.502 R60.1@136.083,105.943 ; 133.759,106.502 ccw(c133.759,106.982) v1@134.098,106.643 ; v1@134.043,106.502 cw(c134.043,103.934) R60.1@135.86,105.75 ; v1@134.278,106.643 ccw(c134.617,106.982) 134.617,106.502 ; v1@134.298,106.617 ccw(c134.82,106.918) 134.664,106.336 ; 135.27,106.502 cw(c135.27,105.16) R60.1@136.219,106.109 ; C63.2@146.644,110.719 148.59,110.719 v1(149.428,111.557) 149.835,111.15 U15.2@152.019,111.15 ; C63.2@146.868,110.495 cw(c147.407,109.956) 147.407,110.719 cw(c147.407,111.481) C63.2@146.868,110.942 ; v1@149.518,111.647 ccw(c150.716,112.845) 150.716,111.15
  Bottom Layer w0.508: v1(134.188,106.553) 134.188,105.715 135.001,104.902 146.279,104.902 149.428,108.052 v1(149.428,111.557)
S51: C25.2 R20.1 U16.15 U17.2 | length 49.9
  Top Layer w0.508: v1(147.65,72.746) 147.65,72.187 147.117,71.653 R20.1@146.035,71.653 146.009,71.628 C25.2@146.009,69.291 146.253,69.291 147.752,67.793 147.752,61.544 150.292,59.004 157.582,59.004 160.655,62.078 U16.15@160.655,63.472 ; v1(156.337,82.474) 156.362,82.499 U17.2@159.715,82.499
  Bottom Layer w0.508: v1(147.65,72.746) 149.606,72.746 150.597,73.736 150.597,80.162 152.908,82.474 v1(156.337,82.474)
S52: C37.2 R25.1 U16.13 U17.6 | length 46.4
  Top Layer w0.508: v1(148.184,77.394) 148.285,77.394 147.371,76.479 R25.1@146.009,76.479 145.984,76.454 C37.2@145.984,74.092 148.082,74.092 148.793,73.381 148.793,62.382 151.257,59.919 156.489,59.919 158.115,61.544 U16.13@158.115,63.472 ; U17.6@154.515,83.769 156.235,83.769 v1(156.312,83.693)
  Bottom Layer w0.508: v1(148.184,77.394) 148.895,77.394 149.581,78.08 149.581,80.721 152.603,83.744 v1@156.388,83.744
S53: C55.2 R80.1 U16.11 U18.2 | length 50.4
  Top Layer w0.508: v1(148.895,82.271) 148.006,81.382 C55.2@146.009,81.382 146.06,81.331 R80.1@146.06,78.918 148.488,78.918 149.86,77.546 149.86,62.967 151.943,60.884 155.118,60.884 155.575,61.341 U16.11@155.575,63.472 ; v1(157.099,93.701) 157.328,93.929 U18.2@158.826,93.929
  Bottom Layer w0.508: v1(148.895,82.271) 148.895,84.557 157.099,92.761 v1(157.099,93.701) v1@157.099,93.828
SIN11: C68.2 CH1.4 R29.1 | length 38.4
  Top Layer w0.508: CH1.4@66.777,29.896 66.777,30.251 71.323,34.798 81.28,34.798 83.617,37.135 83.617,47.066 85.547,48.997 R29.1@86.705,48.997
  Bottom Layer w0.508: C68.2@64.704,33.553 66.777,31.481 CH1.4@66.777,29.896
SIN12: C88.2 CH1.5 R38.1 | length 34.4
  Top Layer w0.508: CH1.5@70.737,29.896 70.737,31.722 72.669,33.655 81.407,33.655 84.43,36.678 84.43,45.847 85.217,46.634 R38.1@86.68,46.634
  Bottom Layer w0.508: C88.2@68.138,33.919 C88.2@68.138,33.655 68.138,32.751 70.737,30.152 CH1.5@70.737,29.896
SIN13: C72.2 CH1.6 R53.1 | length 24.7
  Top Layer w0.508: CH1.6@74.697,29.896 74.697,31.796 75.743,32.842 81.839,32.842 85.192,36.195 85.192,41.58 85.827,42.215 86.655,42.215 86.705,42.266 C72.2@86.705,44.348 ; R53.1@86.431,41.991 ccw(c85.892,41.452) 85.892,42.215 ccw(c85.892,42.978) R53.1@86.431,42.438
SIN21: C71.1 CH2.4 R30.1 | length 73.3
  Top Layer w0.508: v1(127.279,36.754) 127.279,35.636 128.397,34.519 163.754,34.519 167.869,38.633 167.869,46.406 166.446,47.828 162.128,47.828 161.508,47.208 R30.1@161.508,45.644
  Bottom Layer w0.508: C71.1@120.914,34.468 122.743,36.297 126.822,36.297 v1(127.279,36.754)
  Bottom Layer w0.762: C71.1@120.914,34.468 121.183,34.468 122.987,32.664 CH2.4@122.987,29.896
SIN22: C89.2 CH2.5 R40.1 | length 49.3
  Top Layer w0.508: v1(130.962,36.576) 132.182,35.357 159.969,35.357 161.559,36.947 R40.1@161.559,43.104
  Bottom Layer w0.508: C89.2@125.948,34.442 125.948,35.27 126.314,35.636 130.023,35.636 v1(130.962,36.576)
  Bottom Layer w0.762: C89.2@125.948,34.442 125.948,30.894 CH2.5@126.947,29.896
SIN23: C75.1 CH2.6 R54.1 | length 21.2
  Bottom Layer w0.508: CH2.6@130.907,29.896 130.907,31.059 132.207,32.36 133.833,32.36 134.986,33.513 C75.1@134.986,34.366 135.164,34.188 R54.1@149.037,34.188
SIN31: C69.1 CH3.4 R31.1 | length 39
  Top Layer w0.381: C69.1@38.395,112.979 R31.1@38.395,115.291 ; R31.1@38.471,115.189 38.471,116.068 38.913,116.51 47.32,116.51 47.828,117.018 53.01,117.018 53.442,117.45 69.139,117.45 70.728,119.039 CH3.4@70.728,121.336
SIN32: C90.2 CH3.5 R42.1 | length 41.5
  Top Layer w0.381: C90.2@38.42,108.382 38.395,108.407 R42.1@38.395,110.795 38.1,110.795 37.211,111.684 37.211,116.434 38.024,117.246 46.711,117.246 47.32,117.856 52.73,117.856 53.01,118.135 65.659,118.135 66.768,119.244 CH3.5@66.768,121.336
SIN33: C73.1 CH3.6 R55.1 | length 43
  Top Layer w0.381: R55.1@38.395,106.02 37.084,106.02 36.373,106.731 36.373,116.84 37.567,118.034 43.84,118.034 44.729,118.923 ; C73.1@44.668,119.761 44.562,119.654 44.729,119.487 44.729,118.923 ; CH3.6@62.808,121.336 62.808,119.602 62.027,118.821 52.553,118.821 52.248,118.516 45.136,118.516 44.729,118.923
SIN41: C70.1 CH4.4 R32.1 | length 15.6
  Top Layer w0.508: R32.1@120.233,111.785 120.259,111.811 120.259,115.204 122.978,117.924 125.518,117.924 126.938,119.344 CH4.4@126.938,121.336 ; 120.284,112.674 C70.1@120.284,114.442
SIN42: C91.2 CH4.5 R44.1 | length 17.1
  Top Layer w0.508: C91.2@120.259,107.112 120.233,107.137 R44.1@120.233,109.449 119.151,109.449 118.872,109.728 118.872,115.468 122.978,119.575 CH4.5@122.978,121.336
SIN43: C74.1 CH4.6 R56.1 | length 43.2
  Top Layer w0.508: C74.1@95.494,119.253 95.494,120.233 96.139,120.879 105.537,120.879 107.442,118.974 117.653,118.974 117.678,118.948 ; CH4.6@119.018,121.336 119.018,120.288 117.678,118.948 ; R56.1@120.233,104.8 118.897,104.8 117.678,106.02 117.678,118.948
SIN51: C92.2 CH5.4 R17.1 | length 15.6
  Top Layer w0.508: R17.1@163.967,72.669 172.999,72.669 CH5.4@173.38,73.05
  Bottom Layer w0.508: C92.2@167.996,71.537 168.341,71.882 172.212,71.882 CH5.4@173.38,73.05
SIN52: C93.2 CH5.5 R22.1 | length 15.8
  Top Layer w0.508: R22.1@163.993,75.209 166.98,75.209 168.781,77.01 CH5.5@173.38,77.01
  Bottom Layer w0.508: C93.2@167.945,76.464 172.834,76.464 CH5.5@173.38,77.01
SIN53: C94.2 CH5.6 R77.1 | length 16.3
  Top Layer w0.508: R77.1@163.993,77.648 165.811,77.648 169.134,80.97 CH5.6@173.38,80.97
  Bottom Layer w0.508: C94.2@167.919,81.239 173.111,81.239 CH5.6@173.38,80.97
SOUT11: C39.2 R96.2 U8.1 U25.26 | length 103.2
  Top Layer w0.254: v3@128.77,64.143 ccw(c127.887,65.026) 129.136,65.026 ; v3(128.905,64.008) 129.136,64.239 ; v3@128.95,63.963 ccw(c128.501,64.412) 129.136,64.412 ; v3@128.956,64.192 ccw(c129.005,64.37) 129.136,64.239 ; v3@129.089,64.059 cw(c129.267,64.108) 129.136,64.239 ; U25.26@129.136,67 129.136,64.239
  Top Layer w0.508: C39.2@50.963,51.816 51.928,52.781 57.353,52.781 59.182,54.61 67.031,54.61 70.079,57.658 102.108,57.658 105.41,60.96 v3(120.396,60.96) 120.396,59.319 R96.2@120.498,59.218 ; C39.2@50.963,52.162 ccw(c50.963,52.997) 51.553,52.407 ; C39.2@51.279,51.846 cw(c51.969,51.846) C39.2@51.481,52.334 ; v1(54.178,48.489) 55.499,49.809 55.499,52.451 ; v1(55.093,46.076) 56.21,44.958 U8.1@58.42,44.958 ; R96.2@120.244,59.441 ccw(c119.878,59.808) 120.396,59.808 ; 120.396,60.153 ccw(c121.403,60.153) R96.2@120.691,59.441
  Bottom Layer w0.508: v1(54.178,48.489) 54.178,46.99 v1(55.093,46.076) ; v3(120.396,60.96) 125.857,60.96 v3(128.905,64.008)
SOUT12: C41.2 R97.2 U8.7 U25.27 | length 102.1
  Top Layer w0.254: U25.27@129.636,67 129.636,62.896 v3(130.302,62.23) ; v3@130.112,62.23 ccw(c129.652,62.23) 129.977,62.555 ccw(c130.302,62.88) v3@130.302,62.42
  Top Layer w0.508: U8.7@59.69,50.158 59.69,51.689 v1(61.087,53.086) 61.849,53.848 67.716,53.848 70.764,56.896 102.743,56.896 105.537,59.69 v3@110.007,59.69 ; v3@110.052,59.67 cw(c110.651,59.072) 110.651,59.919 ; v3@110.236,59.919 117.104,59.919 R97.2@117.805,59.218 ; 115.32,59.919 cw(c115.32,56.762) R97.2@117.552,58.994 ; 116.546,59.919 cw(c116.546,57.989) R97.2@117.911,59.353 ; 117.215,59.808 cw(c116.624,59.218) R97.2@117.459,59.218 ; R97.2@117.287,59.736 ccw(c117.775,60.224) R97.2@117.775,59.534
  Bottom Layer w0.508: C41.2@57.186,53.34 60.833,53.34 v1(61.087,53.086) ; C41.2@57.409,53.117 cw(c57.948,52.577) 57.948,53.34 cw(c57.948,54.103) C41.2@57.409,53.563 ; 60.167,53.34 cw(c60.167,52.166) v1@60.997,52.996 ; v3(110.007,59.715) 110.033,59.69 127.762,59.69 v3(130.302,62.23)
SOUT13: C49.2 R104.2 U12.1 U25.29 | length 89.7
  Top Layer w0.254: U25.29@130.636,67 130.636,64.563 132.715,62.484 v3(132.842,62.484) ; 132.3,62.899 ccw(c132.842,63.441) v3@132.842,62.674
  Top Layer w0.381: v3(110.007,58.166) 110.973,59.131 114.427,59.131 ; R104.2@114.554,58.116 ccw(c113.838,58.542) 114.427,59.131 ; R104.2@114.693,58.234 ccw(c114.404,58.649) 114.91,58.649 ; 114.773,58.785 cw(c114.272,58.284) R104.2@114.881,57.921 ; R104.2@114.91,57.922 114.91,58.649 ; R104.2@115.126,58.234 cw(c115.415,58.649) 114.91,58.649 ; 114.427,59.131 114.91,58.649
  Top Layer w0.508: C49.2@75.87,43.165 77.556,43.165 78.359,43.967 U12.1@78.359,44.958 78.359,47.396 77.216,48.539 77.216,52.527 79.807,55.118 104.648,55.118 107.696,58.166 v3(110.007,58.166) ; C49.2@76.123,42.941 cw(c76.663,42.402) 76.663,43.165 cw(c76.663,43.928) C49.2@76.123,43.388 ; 77.934,43.542 ccw(c77.018,44.458) U12.1@78.313,44.458
  Bottom Layer w0.508: v3(110.007,58.166) 129.413,58.166 132.842,61.595 v3(132.842,62.484)
SOUT21: C40.2 R98.2 U9.1 U25.33 | length 49.6
  Top Layer w0.254: U25.33@133.836,68.7 135.897,68.7 138.557,66.04 138.557,56.515 v3(138.43,56.388) ; v3@138.295,56.523 ccw(c137.663,57.155) 138.557,57.155
  Top Layer w0.508: R98.2@126.294,40.416 ccw(c125.755,40.956) 126.517,40.956 ccw(c127.28,40.956) R98.2@126.741,40.416 ; R98.2@126.517,40.193 126.517,42.901 127.94,44.323 ; C40.2@126.517,44.364 126.558,44.323 127.94,44.323 ; C40.2@126.771,44.14 cw(c127.212,43.699) 127.212,44.323 ; C40.2@126.771,44.587 ccw(c127.408,45.225) 127.408,44.323 ; v1(131.267,47.65) 130.429,46.812 U9.1@130.429,44.323 127.94,44.323
  Bottom Layer w0.508: v1(131.267,47.65) 133.375,47.65 141.275,55.55 141.275,56.82 140.411,57.683 139.116,57.683 138.43,56.998 v3(138.43,56.388)
SOUT22: C44.2 R101.2 U9.7 U25.34 | length 42.3
  Top Layer w0.254: U25.34@133.836,69.2 136.286,69.2 139.319,66.167 139.319,56.82 v3(139.852,56.286) ; v3@139.662,56.286 ccw(c139.202,56.286) 139.527,56.612 ccw(c139.852,56.937) v3@139.852,56.477
  Top Layer w0.508: U9.7@131.699,49.523 131.699,51.435 133.096,52.832 v1(136.271,52.832) 138.633,52.832 138.75,52.949 R101.2@138.75,53.035 ; 137.569,52.832 ccw(c137.569,54.186) R101.2@138.527,53.229
  Bottom Layer w0.508: C44.2@130.109,51.486 134.925,51.486 v1(136.271,52.832) 136.5,52.832 139.852,56.185 v3(139.852,56.286) ; C44.2@130.332,51.262 cw(c130.872,50.723) 130.872,51.486 cw(c130.872,52.249) C44.2@130.332,51.709 ; v1@136.271,52.959 ccw(c136.271,53.817) 136.878,53.21 ; 139.672,56.005 ccw(c139.39,56.286) v3@139.789,56.286
SOUT23: C50.2 R105.2 U13.1 U25.35 | length 43.4
  Top Layer w0.254: U25.35@133.836,69.7 136.675,69.7 139.954,66.421 139.954,57.709 144.069,53.594 144.069,53.01
  Top Layer w0.508: 144.069,53.01 144.069,49.936 146.812,47.193 U13.1@146.812,44.45 145.999,44.45 ; C50.2@144.429,45.003 ccw(c145.247,45.332) 145.247,44.45 ; C50.2@144.577,45.075 145.202,44.45 145.999,44.45 ; C50.2@144.607,44.759 cw(c144.607,44.068) C50.2@145.095,44.557 ; C50.2@144.9,45.193 ccw(c145.999,45.635) 145.999,44.45 ; C50.2@144.923,45.075 ccw(c145.758,45.075) 145.167,44.484 ; R105.2@145.115,41.178 ccw(c144.576,41.718) 145.339,41.718 ccw(c146.102,41.718) R105.2@145.562,41.178 ; R105.2@145.339,40.955 145.339,43.79 145.999,44.45
SOUT31: C42.2 R99.2 U10.1 U25.37 | length 121.6
  Top Layer w0.254: U25.37@133.836,70.7 137.834,70.7 139.522,69.012 v3(139.827,69.012)
  Top Layer w0.508: U10.1@66.269,113.081 66.269,113.64 v1(66.802,114.173) ; C42.2@74.087,105.03 cw(c73.547,104.49) 74.31,104.49 cw(c75.073,104.49) C42.2@74.534,105.03 ; C42.2@74.31,105.283 74.31,104.15 75.098,103.363 R99.2@79.858,103.363 79.858,105.08 v3(78.537,106.401) ; R99.2@79.604,103.139 ccw(c79.065,102.6) 79.065,103.363 ccw(c79.065,104.126) R99.2@79.604,103.586 ; R99.2@79.634,103.586 ccw(c79.095,104.126) 79.858,104.126 ccw(c80.62,104.126) R99.2@80.081,103.586
  Bottom Layer w0.508: v1(66.802,114.173) 66.98,113.995 78.511,113.995 80.467,112.039 80.467,107.442 79.35,106.324 ; 79.299,106.274 79.35,106.324 ; v3(139.827,69.012) 137.744,69.012 117.983,88.773 94.361,88.773 90.551,92.583 90.551,94.31 78.537,106.324 79.35,106.324
SOUT32: C45.2 R102.2 U10.7 U25.38 | length 102.8
  Top Layer w0.254: U25.38@133.836,71.2 138.223,71.2 139.319,70.104 139.787,70.104 v3@139.845,70.162 ; v3@139.845,70.104 v3(139.878,70.104)
  Top Layer w0.508: U10.7@71.469,111.811 73.294,111.811 C45.2@74.31,110.795 74.31,110.17 ; 73.72,111.385 ccw(c74.31,111.976) C45.2@74.31,111.141 ; C45.2@73.792,111.313 cw(c73.304,110.825) C45.2@73.994,110.825 ; C45.2@74.121,110.799 ccw(c74.832,110.67) 74.321,110.159 ; C45.2@74.133,110.503 cw(c73.908,110.17) 74.31,110.17 ; C45.2@74.487,110.503 ccw(c74.712,110.17) 74.31,110.17 ; C45.2@74.621,110.708 ccw(c75.99,110.458) 75.006,109.474 ; 80.998,105.92 cw(c80.716,105.639) v3@81.115,105.639 ; R102.2@82.623,103.586 ccw(c82.083,104.126) 82.846,104.126 ccw(c83.609,104.126) R102.2@83.07,103.586 ; R102.2@82.846,103.363 82.846,104.656 81.864,105.639 v3(81.178,105.639) 81.178,105.74 77.445,109.474 75.006,109.474 ; 74.31,110.17 75.006,109.474
  Bottom Layer w0.508: v3(81.178,105.639) 81.229,105.639 91.44,95.428 91.44,93.218 94.869,89.789 118.364,89.789 138.049,70.104 v3(139.878,70.104)
SOUT33: C51.2 R106.2 U14.1 U25.39 | length 98.8
  Top Layer w0.254: U25.39@133.836,71.7 139.628,71.7 v3(139.954,71.374) ; v3@139.763,71.374 ccw(c139.304,71.374) 139.629,71.699 ccw(c139.954,72.024) v3@139.954,71.564
  Top Layer w0.508: R106.2@85.612,103.586 ccw(c85.072,104.126) 85.835,104.126 ccw(c86.598,104.126) R106.2@86.059,103.586 ; v1(85.623,112.903) 86.436,112.09 U14.1@87.046,112.09 ; R106.2@85.835,103.363 85.835,106.231 v3(85.852,106.248) ; U14.1@86.28,112.246 ccw(c86.546,112.512) U14.1@86.546,112.136
  Bottom Layer w0.508: C51.2@83.48,108.382 cw(c82.94,107.843) 83.703,107.843 cw(c84.466,107.843) C51.2@83.927,108.382 ; C51.2@83.927,108.412 cw(c84.466,107.873) 84.466,108.636 cw(c84.466,109.399) C51.2@83.927,108.859 ; 85.515,106.172 ccw(c85.515,106.585) v3@85.807,106.293 ; v1(85.623,112.903) 85.623,109.372 84.887,108.636 C51.2@83.703,108.636 83.703,106.543 84.074,106.172 ; v3(85.852,106.248) 85.776,106.172 84.074,106.172 ; v3(139.954,71.374) 138.049,71.374 118.618,90.805 95.25,90.805 92.329,93.726 92.329,97.917 84.074,106.172
SOUT41: C43.2 R100.2 U11.1 U25.55 | length 62
  Top Layer w0.254: U25.55@129.136,77.9 129.136,90.706 130.581,92.151 v3(130.581,93.472)
  Top Layer w0.508: v1(134.239,113.64) 134.239,114.884 135.407,116.053 140.208,116.053 141.326,114.935 v1(141.326,112.852)
  Bottom Layer w0.508: v3(130.581,93.472) 131.902,93.472 132.471,94.041 C43.2@132.471,97.561 132.283,97.749 132.283,102.718 129.413,105.588 129.413,109.449 133.604,113.64 v1(134.239,113.64) ; C43.2@132.248,97.308 cw(c131.708,96.769) 132.471,96.769 cw(c133.234,96.769) C43.2@132.695,97.308 ; 132.283,98.808 ccw(c133.688,98.808) C43.2@132.695,97.815 ; U11.1@141.351,111.455 141.351,112.827 v1(141.326,112.852) 141.707,113.233 R100.2@144.084,113.233 ; v1@141.415,112.762 cw(c142.552,111.626) 142.552,113.233 ; R100.2@143.861,113.01 ccw(c143.321,112.47) 143.321,113.233 ccw(c143.321,113.996) R100.2@143.861,113.457